# EAGLE board me433-hw6_p2 (EAGLE 9.6.2)
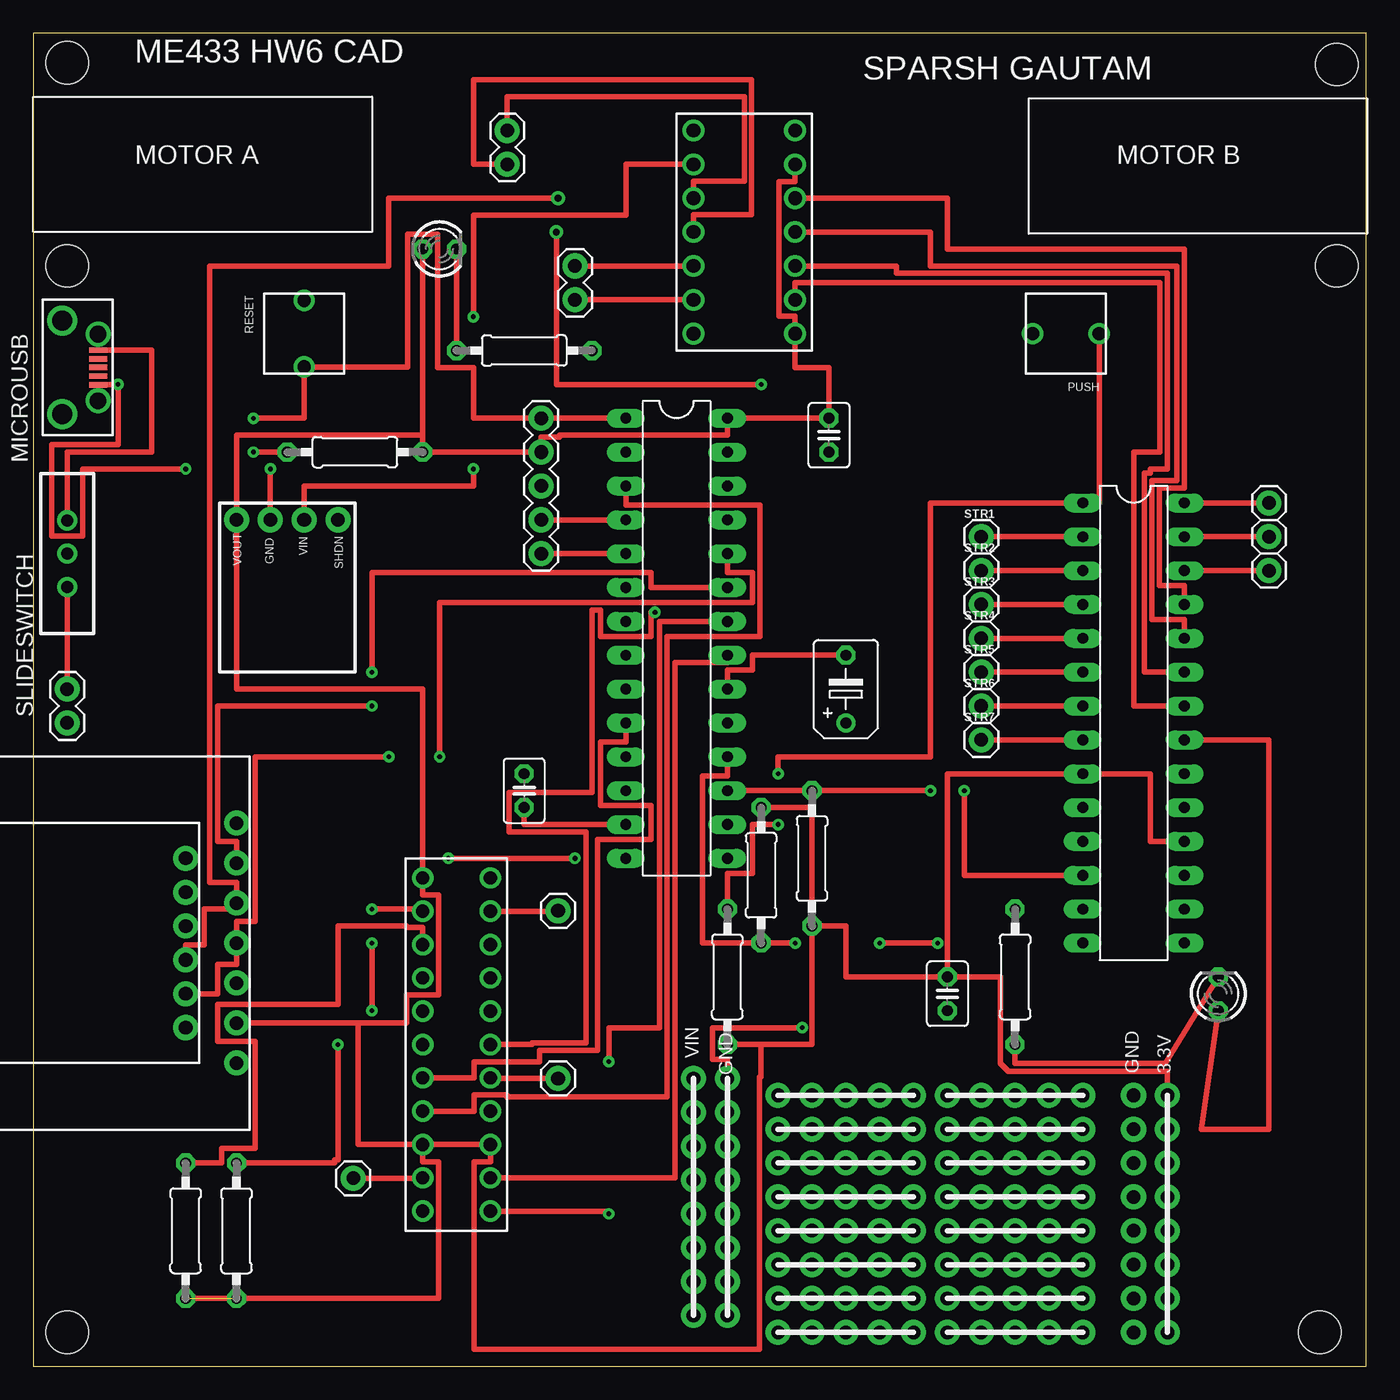
[diagram p0: board, top side]
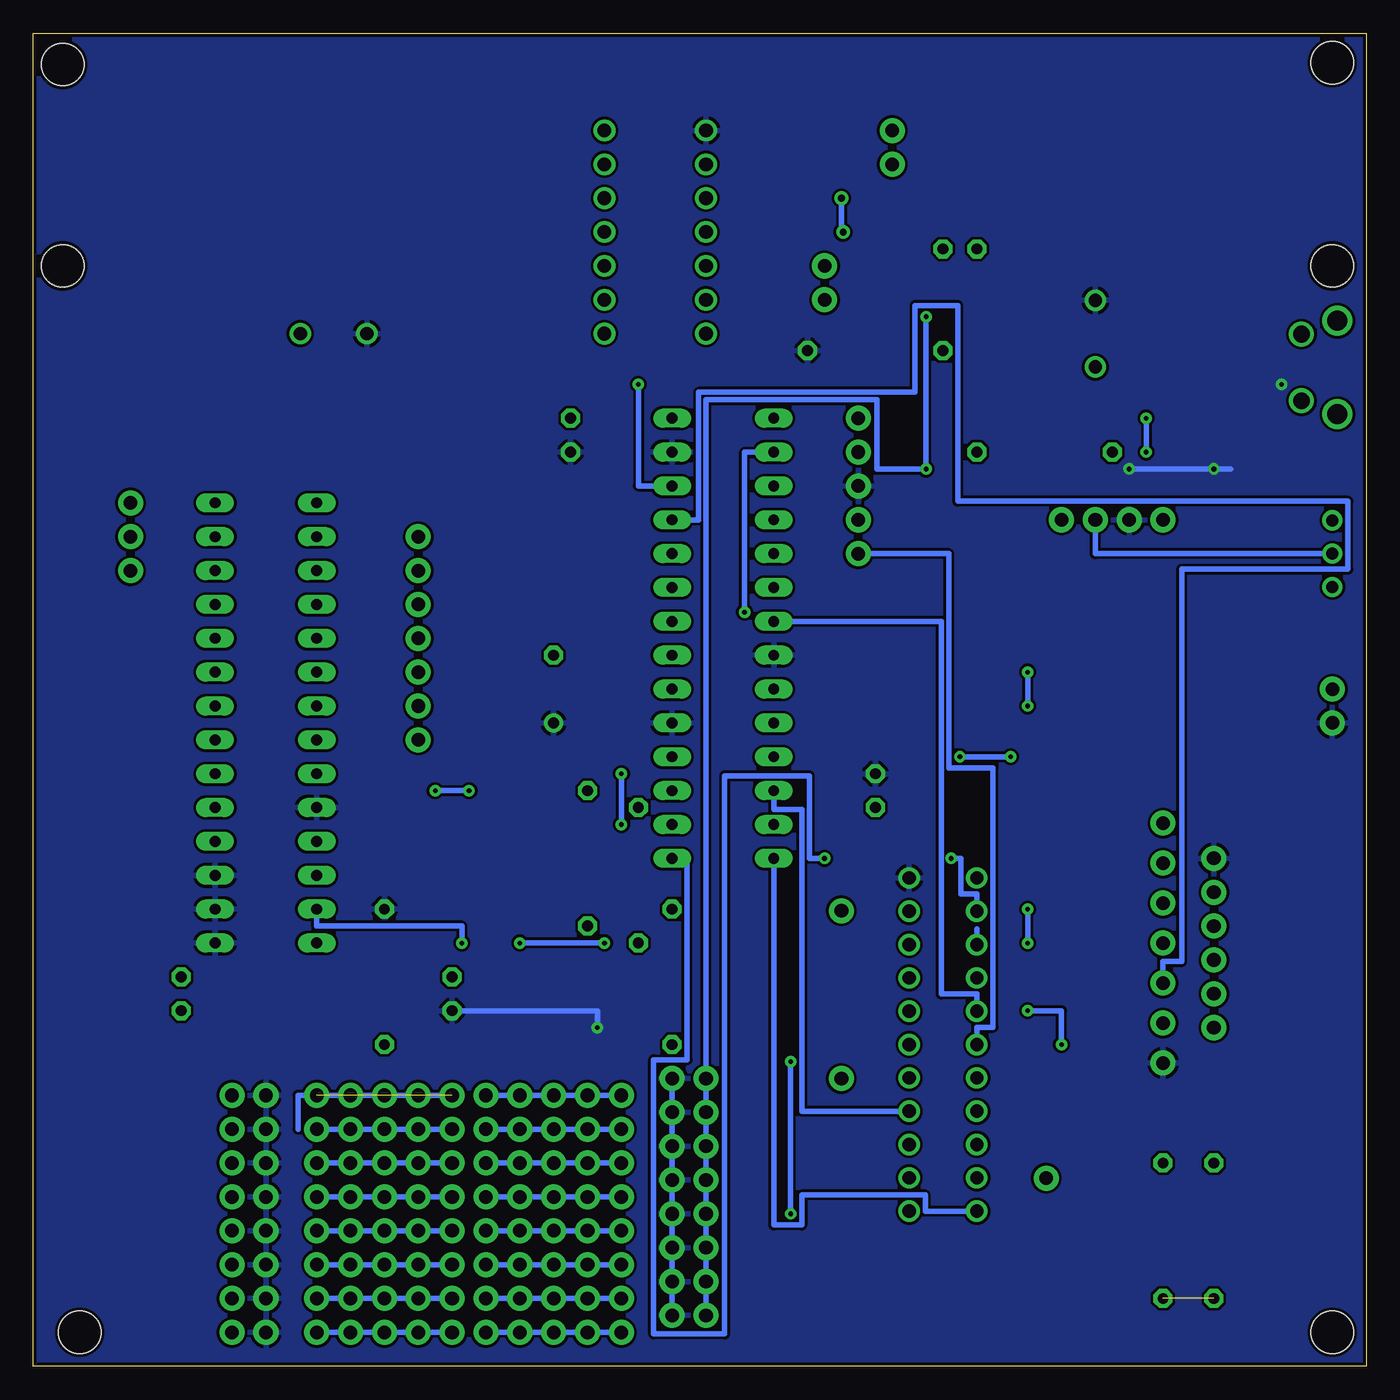
[diagram p1: board, bottom side, seen from below]

Size 100 x 100 mm. Coordinates in mm from the lower left corner, seen from the top.
Outline: 0,0 100,0 100,100 0,100 0,0
Copper layers (1*16): Top 0.035mm / dielectric 1.5mm / Bottom 0.035mm
Design rules "SparkFun": minimum track width 8mil, minimum drill 20mil, track to track 8mil, track to pad 8mil, pad to pad 8mil, via to via 8mil, smd to smd 8mil, copper to edge 10mil, drill to drill 8mil, minimum pad ring 12mil, minimum via ring 10mil, stop-mask expansion 4mil, vias tented up to drill 25mil, thermal gap 10mil
Holes 3.17 mm at 2.54,97.79 2.54,82.55 97.79,82.55 97.79,97.66 2.54,2.54 96.52,2.54

## Footprints (pad centres in the part's own frame; a part is rotated, then mirrored left to right if it is on the bottom)
1X02 = drill 1.016 pad 1.88: 1 0,0; 2 2.54,0
C025-030X050 = drill 0.813 octagon: 1 -1.27,0; 2 1.27,0
B45181B = drill 0.813: + -2.54,0 | drill 0.813 octagon: - 2.54,0
1X01 = drill 1.016 pad 1.88: 1 0,0
1X08 = drill 1.016 pad 1.88: 1 0,0; 2 2.54,0; 3 5.08,0; 4 7.62,0; 5 10.16,0; 6 12.7,0; 7 15.24,0; 8 17.78,0
LED3MM = drill 0.813 octagon: A -1.27,0; K 1.27,0
0207/10 = drill 0.813 octagon: 1 -5.08,0; 2 5.08,0
PUSH = drill 1: P$1 -2.5,0; P$2 2.5,0
DIL28-3 = drill 0.813 long: 1 -16.51,-3.81; 2 -13.97,-3.81; 3 -11.43,-3.81; 4 -8.89,-3.81; 5 -6.35,-3.81; 6 -3.81,-3.81; 7 -1.27,-3.81; 8 1.27,-3.81; 9 3.81,-3.81; 10 6.35,-3.81; 11 8.89,-3.81; 12 11.43,-3.81; 13 13.97,-3.81; 14 16.51,-3.81; 15 16.51,3.81; 16 13.97,3.81; 17 11.43,3.81; 18 8.89,3.81; 19 6.35,3.81; 20 3.81,3.81; 21 1.27,3.81; 22 -1.27,3.81; 23 -3.81,3.81; 24 -6.35,3.81; 25 -8.89,3.81; 26 -11.43,3.81; 27 -13.97,3.81; 28 -16.51,3.81
MICROUSB = smd 0.4 x 1.35: 1.VBUS -1.3,2.7; 2 -0.65,2.7; 3 0,2.7; 4 0.65,2.7; 5.GND 1.3,2.7 | drill 1.25 pad 1.676: P$6 -2.5,2.7; P$7 2.5,2.7 | drill 1.5: P$8 -3.5,0; P$9 3.5,0
SLIDESWITCH = drill 0.9: 1 -2.5,0; 2 0,0; 3 2.5,0
POLULO3V3 = drill 1.016 pad 1.88: 1 0,3.81; 2 0,1.27; 3 0,-1.27; 4 0,-3.81
1X05 = drill 1.016 pad 1.88: 1 0,0; 2 2.54,0; 3 5.08,0; 4 7.62,0; 5 10.16,0
H-BRIDGE = drill 1.02: P$1 -3.81,7.62; P$2 -3.81,5.08; P$3 -3.81,2.54; P$4 -3.81,0; P$5 -3.81,-2.54; P$6 -3.81,-5.08; P$7 -3.81,-7.62; P$8 3.81,-7.62; P$9 3.81,-5.08; P$10 3.81,-2.54; P$11 3.81,0; P$12 3.81,2.54; P$13 3.81,5.08; P$14 3.81,7.62
FRIEND = drill 1.016 pad 1.88: 1 -6.35,0; 2 -3.81,0; 3 -1.27,0; 4 1.27,0; 5 3.81,0; 6 6.35,0
LCD = drill 1.016 pad 1.88: 1 -9,-20.32; 2 -6,-20.32; 3 -3,-20.32; 4 0,-20.32; 5 3,-20.32; 6 6,-20.32; 7 9,-20.32
CAMERA = drill 1: P$1 0,12.5; P$2 0,10; P$3 0,7.5; P$4 0,5; P$5 0,2.5; P$6 0,0; P$7 0,-2.5; P$8 0,-5; P$9 0,-7.5; P$10 0,-10; P$11 0,-12.5; P$12 5.08,-12.5; P$13 5.08,-10; P$14 5.08,-7.5; P$15 5.08,-5; P$16 5.08,-2.5; P$17 5.08,0; P$18 5.08,2.5; P$19 5.08,5; P$20 5.08,7.5; P$21 5.08,10; P$22 5.08,12.5

## Placement (x,y rotation side)
A  [1X02]  40.64,80.01 90 top
B  [1X02]  35.56,90.17 90 top
BAT  [1X02]  2.54,48.26 90 top
C1  0.1uF  [C025-030X050]  59.69,69.85 270 top
C2  10uF  [B45181B]  60.96,50.8 90 top
C3  0.1uF  [C025-030X050]  36.83,43.18 90 top
C4  0.1uF  [C025-030X050]  68.58,27.94 270 top
HREF  [1X01]  39.37,34.16 0 top
J1  [1X08]  55.88,2.54 90 top
J2  [1X08]  58.42,2.54 90 top
J3  [1X08]  60.96,2.54 90 top
J4  [1X08]  63.5,2.54 90 top
J5  [1X08]  66.04,2.54 90 top
J6  [1X08]  68.58,2.54 90 top
J7  [1X08]  71.12,2.54 90 top
J8  [1X08]  73.66,2.54 90 top
J9  [1X08]  76.2,2.54 90 top
J10  [1X08]  78.74,2.54 90 top
J11  [1X08]  49.53,3.81 90 top
J12  [1X08]  52.07,3.81 90 top
J13  [1X08]  85.09,2.54 90 top
J14  [1X08]  82.55,2.54 90 top
LED1  RED  [LED3MM]  30.48,83.82 0 top
LED2  GREEN  [LED3MM]  88.9,27.94 90 top
PWDN  [1X01]  39.37,21.59 0 top
R1  330  [0207/10]  36.83,76.2 180 top
R2  10k  [0207/10]  24.13,68.58 0 top
R3  10k  [0207/10]  58.42,38.1 270 top
R4  10k  [0207/10]  54.61,36.83 90 top
R5  330  [0207/10]  73.66,29.21 270 top
R6  10k  [0207/10]  52.07,29.21 270 top
R7  4.7k  [0207/10]  15.24,10.16 270 top
R8  4.7k  [0207/10]  11.43,10.16 270 top
RESET  PUSH  [PUSH]  20.32,77.47 90 top
STR  [1X01]  24,14.1 0 top
STR1  [1X01]  71.12,62.23 0 top
STR2  [1X01]  71.12,59.69 0 top
STR3  [1X01]  71.12,57.15 0 top
STR4  [1X01]  71.12,54.61 0 top
STR5  [1X01]  71.12,52.07 0 top
STR6  [1X01]  71.12,49.53 0 top
STR7  [1X01]  71.12,46.99 0 top
STR8  [1X01]  92.71,62.23 0 top
STR9  [1X01]  92.71,64.77 0 top
STR10  [1X01]  92.71,59.69 0 top
U$1  PIC32MX170F256B  [DIL28-3]  48.26,54.61 270 top
U$2  MICROUSB  [MICROUSB]  2.16,74.93 270 top
U$3  SLIDESWITCH  [SLIDESWITCH]  2.54,60.96 270 top
U$4  POLOLU3V3  [POLULO3V3]  19.05,63.5 90 top
U$5  SNAP  [1X05]  38.1,71.12 270 top
U$6  H-BRIDGE  [H-BRIDGE]  53.34,85.09 0 top
U$7  FRIEND  [FRIEND]  11.43,31.75 90 top
U$8  LCD  [LCD]  -5.08,31.75 90 top
U$9  IO_EXPANDER  [DIL28-3]  82.55,48.26 270 top
U$10  CAMERA  [CAMERA]  29.21,24.13 0 top
USER  PUSH  [PUSH]  77.47,77.47 0 top

## Library data of the parts
A B BAT HREF LED1 LED2 PWDN RESET STR STR1-STR10 U$1-U$10 USER = hw6_lib
C1-C4 = hw6_lib; SPICEPREFIX: C
J1-J14 = hw6_lib; PROD_ID: CONN-08438
R1-R8 = hw6_lib; SPICEPREFIX: R

## Nets
+3V3: C1.1 C4.1 J13.1 J13.2 J13.3 J13.4 J13.5 J13.6 J13.7 J13.8 LED1.A R2.2 R3.2 R4.2 R6.2 R7.2 R8.2 U$1.28 U$4.1 U$5.2 U$6.P$8 U$6.P$13 U$8.2 U$9.9 U$9.18 U$10.P$1 U$10.P$9 U$10.P$14
+5V: U$2.1.VBUS U$3.1
ADIR: U$6.P$9 U$9.22
APWM: U$6.P$10 U$9.23
B0-PGD-D4: U$1.4 U$5.4
B1-PGC-D5: U$1.5 U$5.5 U$10.P$6
B6: R7.1 U$1.15 U$10.P$2
B7: R8.1 U$10.P$3
B8: R3.1 U$1.17 U$9.12
B9: R4.1 U$1.18 U$9.13
B12: U$1.23 U$8.6
B13: U$1.24 U$7.2 U$8.4
B14: U$1.25 U$8.3
B15: U$1.26 U$7.3 U$8.5
BDIR: U$6.P$11 U$9.24
BPWM: U$6.P$12 U$9.25
D0: U$1.2 U$10.P$17
D1: U$1.3 U$10.P$8
D2: U$10.P$18
D3: U$1.10 U$10.P$7
D6: U$10.P$20
D7: U$1.7 U$10.P$5
GND: BAT.1 C1.2 C2.+ C3.2 C4.2 J12.1 J12.2 J12.3 J12.4 J12.5 J12.6 J12.7 J12.8 J14.1 J14.2 J14.3 J14.4 J14.5 J14.6 J14.7 J14.8 R1.1 R5.1 RESET.P$2 U$1.8 U$1.19 U$1.27 U$2.5.GND U$4.2 U$5.3 U$6.P$1 U$7.6 U$8.1 U$9.10 U$9.15 U$9.16 U$9.17 U$10.P$22 USER.P$1
MCLR: R2.1 RESET.P$1 U$1.1 U$5.1
N$2: LED1.K R1.2
N$3: C2.- U$1.20
N$4: C3.1 U$1.13
N$5: LED2.A U$9.21
N$6: R6.1 U$9.1 USER.P$2
N$7: LED2.K R5.2
N$8: U$6.P$14
N$9: B.2 U$6.P$3
N$10: B.1 U$6.P$4
N$11: A.2 U$6.P$5
N$12: A.1 U$6.P$6
N$13: STR.1 U$10.P$10
N$14: PWDN.1 U$10.P$16
N$15: HREF.1 U$10.P$21
N$16: STR8.1 U$9.27
N$17: STR9.1 U$9.28
N$18: STR10.1 U$9.26
N$19: STR1.1 U$9.2
N$20: STR2.1 U$9.3
N$21: STR3.1 U$9.4
N$22: STR4.1 U$9.5
N$23: STR5.1 U$9.6
N$24: STR6.1 U$9.7
N$25: STR7.1 U$9.8
N$26: J1.8 J2.8 J3.8 J4.8 J5.8
N$27: J1.7 J2.7 J3.7 J4.7 J5.7
N$28: J1.6 J2.6 J3.6 J4.6 J5.6
N$29: J1.5 J2.5 J3.5 J4.5 J5.5
N$30: J1.4 J2.4 J3.4 J4.4 J5.4
N$31: J1.3 J2.3 J3.3 J4.3 J5.3
N$32: J1.2 J2.2 J3.2 J4.2 J5.2
N$33: J1.1 J2.1 J3.1 J4.1 J5.1
N$34: J6.8 J7.8 J8.8 J9.8 J10.8
N$35: J6.7 J7.7 J8.7 J9.7 J10.7
N$36: J6.6 J7.6 J8.6 J9.6 J10.6
N$37: J6.5 J7.5 J8.5 J9.5 J10.5
N$38: J6.4 J7.4 J8.4 J9.4 J10.4
N$39: J6.3 J7.3 J8.3 J9.3 J10.3
N$40: J6.2 J7.2 J8.2 J9.2 J10.2
N$41: J6.1 J7.1 J8.1 J9.1 J10.1
RCK: U$1.12 U$10.P$15
RRST: U$1.21 U$10.P$13
V+: BAT.2 U$3.3
VIN: J11.1 J11.2 J11.3 J11.4 J11.5 J11.6 J11.7 J11.8 U$3.2 U$4.3 U$6.P$2
VSY: U$10.P$4
WR: U$1.14 U$10.P$11
WRST: U$1.22 U$10.P$12

## Tracks (layer width: path | path; a pad name or v marks a point on that pad's centre or on a via)
+3V3  (1 unrouted)
  Top 0.406: R2.2 29.21,69.85 15.24,69.85 U$4.1 15.24,50.8 29.21,50.8 U$10.P$1 29.21,35.34 30.42,35.34 30.42,27.84 28,27.84 28,25.75 U$8.2 24.38,25.75 24.38,16.63 U$10.P$9 | R2.2 LED1.A | R2.2 U$5.2 38.1,69.72 39.5,69.72 39.5,69.85 52.07,69.85 U$1.28 C1.1 59.69,74.93 57.15,74.93 U$6.P$8 57.15,78.79 55.93,78.79 55.93,88.85 57.15,88.85 U$6.P$13 | U$10.P$9 U$10.P$14 34.29,15.34 33.08,15.34 33.08,1.27 54.48,1.27 54.48,21.72 54.61,21.72 54.61,24.13 | C4.1 68.58,44.45 U$9.9 83.82,44.45 83.82,39.37 U$9.18 | U$10.P$9 29.21,15.34 30.42,15.34 30.42,5.08 R8.2 | R3.2 58.42,24.13 54.61,24.13 | R3.2 60.96,33.02 60.96,29.21 C4.1 | R4.2 58.42,41.91 R3.2 | C4.1 72.54,29.21 72.54,22.71 73.14,22.11 85.09,22.11 J13.8 J13.7 J13.6 J13.5 J13.4 J13.3 J13.2 J13.1 | R6.2 54.61,24.13
+5V
  Top 0.406: U$2.1.VBUS 8.89,76.23 8.89,76.2 8.89,68.58 2.54,68.58 U$3.1
ADIR
  Top 0.406: U$9.22 82.55,49.53 82.55,68.58 84.53,68.58 84.53,81.28 57.15,81.28 U$6.P$9
APWM
  Top 0.406: U$9.23 83.36,52.07 83.36,67 83.82,67 83.82,67.31 85.09,67.31 85.09,81.99 64.77,81.99 64.77,82.55 U$6.P$10
B0-PGD-D4
  Top 0.406: U$1.4 U$5.4
B1-PGC-D5
  Top 0.406: U$1.5 U$5.5
  Bottom 0.406: U$10.P$6 29.21,25.42 28,25.42 28,44.88 31.32,44.88 31.32,60.96 U$5.5
B6  (via drill 0.35)
  Top 0.406: v22.86,24.13 22.86,15.49 22.61,15.49 22.61,15.24 R7.1 | v25.4,26.67 v25.4,31.75 | v25.4,34.29 29.21,34.29 U$10.P$2 | v31.14,38.1 v40.64,38.1
  Bottom 0.406: v22.86,24.13 22.86,26.67 v25.4,26.67 | v25.4,31.75 v25.4,34.29 | U$10.P$2 29.21,35.42 30.42,35.42 30.42,38.1 v31.14,38.1 31.32,38.1 | v40.64,38.1 41.79,38.1 41.79,44.3 48.13,44.3 48.13,2.41 53.47,2.41 53.47,22.99 50.95,22.99 50.95,38.1 U$1.15
B7
  Top 0.406: R8.1 14.12,15.24 14.12,16.36 16.64,16.36 16.64,24.35 13.84,24.35 13.84,27.15 22.86,27.15 22.86,33.02 28,33.02 28,32.92 29.21,32.92 U$10.P$3
  Bottom 0.406: U$10.P$3 29.21,32.82
B8  (via drill 0.35)
  Top 0.406: U$1.17 R3.1 v67.31,43.18 | U$9.12 69.85,36.83 v69.85,43.18
  Bottom 0.406: v69.85,43.18 v67.31,43.18
B9  (via drill 0.35)
  Top 0.406: v57.15,31.75 R4.1 50.19,31.75 50.19,44.3 52.07,44.3 U$1.18 | v63.5,31.75 v67.85,31.75 68.02,31.75
  Bottom 0.406: v57.15,31.75 v63.5,31.75 | v67.85,31.75 67.85,33.02 78.74,33.02 U$9.13
  other vias: 78.74,34.29
B12  (via drill 0.35)
  Top 0.406: U$8.6 15.24,39.35 13.84,39.35 13.84,49.53 v25.4,49.53 | U$1.23 46.33,58.42 46.33,59.54 25.4,59.54 v25.4,52.07
  Bottom 0.406: v25.4,49.53 v25.4,52.07
B13  (via drill 0.35)
  Top 0.406: U$7.2 13.84,27.94 13.84,30.15 15.24,30.15 U$8.4 15.24,33.35 16.64,33.35 16.64,45.72 v26.67,45.72 | v30.48,45.72 30.48,57.3 53.95,57.3 53.95,59.54 52.07,59.54 U$1.24
  Bottom 0.406: v26.67,45.72 v30.48,45.72
B14
  Bottom 0.406: U$8.3 15.24,30.35 13.84,30.35 13.84,59.8 1.38,59.8 1.38,64.9 30.63,64.9 30.63,79.58 33.85,79.58 33.85,73.08 50.09,73.08 50.09,63.5 U$1.25
B15  (via drill 0.35, 0.51)
  Top 0.406: U$7.3 11.43,31.62 12.83,31.62 12.83,34.29 15.24,34.29 U$8.5 15.24,36.3 13.23,36.3 13.23,82.55 26.67,82.55 26.67,87.63 v39.37,87.63 | 39.24,85.14 v39.24,85.09 39.24,73.66 v54.61,73.66
  Bottom 0.406: v54.61,73.66 54.61,66.04 U$1.26 | v39.37,87.63 39.37,85.09 v39.24,85.09
BDIR
  Top 0.406: U$9.24 86.36,56.03 83.92,56.03 83.92,66.45 85.8,66.45 85.8,82.55 67.31,82.55 67.31,85.09 U$6.P$11
BPWM
  Top 0.406: U$9.25 86.36,58.57 84.48,58.57 84.48,65.89 86.36,65.89 86.36,83.82 68.58,83.82 68.58,87.63 U$6.P$12
D0  (via drill 0.35)
  Top 0.406: U$10.P$17 37.41,24.13 37.41,24.25 41.48,24.25 41.48,40.08 35.71,40.08 35.71,43.03 41.91,43.03 41.91,56.74 42.57,56.74 42.57,54.76 46.33,54.76 46.33,56.57 v46.64,56.57
  Bottom 0.406: v46.64,56.57 46.64,68.58 U$1.2
D1
  Top 0.406: U$10.P$8 33.08,19.13 33.08,20.34 35.5,20.34 35.5,20.19 47.55,20.19 47.55,54.76 54.51,54.76 54.51,64.62 44.45,64.62 U$1.3
D3
  Top 0.406: U$10.P$7 33.08,21.63 33.08,22.84 37.97,22.84 37.97,23.7 42.34,23.7 42.34,39.52 46.33,39.52 46.33,42.06 42.57,42.06 42.57,46.84 44.45,46.84 U$1.10
D7
  Bottom 0.406: U$10.P$5 29.21,27.92 31.87,27.92 31.87,55.88 U$1.7
GND  (via drill 0.35)
  Top 0.406: U$2.5.GND 6.35,73.63 v6.35,73.66 6.35,69.14 1.38,69.14 1.38,62.3 3.7,62.3 3.7,67.31 v11.43,67.31 | J12.8 52.07,23.01 50.95,23.01 50.95,25.4 v57.69,25.4 57.86,25.4 | U$4.2 v17.78,67.31
  Bottom 0.406: v57.69,25.4 57.69,26.67 C4.2 | 10.16,67.31 v11.43,67.31 v17.78,67.31 | J12.8 J12.7 J12.6 J12.5 J12.4 J12.3 J12.2 J12.1
  pour Bottom: 0,0 100.33,0 100.33,99.06 100.33,100.33 0,100.33
  pour Bottom: 0,0 100.33,0 100.33,100.33 0,100.33
  pour Bottom: 0,0 100.33,0 100.33,100.33 0,100.33
  pour Bottom: 0,0 100.33,0 100.33,100.33 0,100.33
MCLR  (via drill 0.35)
  Top 0.406: U$1.1 U$5.1 33.02,71.12 33.02,74.93 30.33,74.93 30.33,84.94 28.09,84.94 28.09,74.97 RESET.P$1 20.32,71.12 v16.51,71.12 | v16.51,68.58 R2.1
  Bottom 0.406: v16.51,71.12 v16.51,68.58
N$2
  Top 0.406: R1.2 LED1.K
N$3
  Top 0.406: U$1.20 52.07,52.22 53.95,52.22 53.95,53.34 C2.-
N$4
  Top 0.406: U$1.13 36.83,40.64 C3.1
N$5
  Top 0.406: LED2.A 87.63,17.78 92.71,17.78 92.71,46.99 U$9.21
N$6  (via drill 0.35)
  Top 0.406: USER.P$2 79.97,64.77 U$9.1 67.31,64.77 67.31,45.72 55.88,45.72 v55.88,44.45 | R6.1 52.07,36.98 53.95,36.98 53.95,40.64 v55.88,40.64
  Bottom 0.406: v55.88,40.64 v55.88,44.45
N$7
  Top 0.406: LED2.K 84.94,22.71 73.66,22.71 R5.2
N$9
  Top 0.406: U$6.P$3 49.53,88.9 53.34,88.9 53.34,95.25 35.56,95.25 B.2
N$10
  Top 0.406: U$6.P$4 49.53,86.41 53.9,86.41 53.9,96.52 33.02,96.52 33.02,90.17 B.1
N$11
  Top 0.406: U$6.P$5 A.2
N$12
  Top 0.406: U$6.P$6 A.1
N$13
  Top 0.406: U$10.P$10 29.21,14.1 STR.1
N$14
  Top 0.406: U$10.P$16 34.29,21.59 PWDN.1
N$15
  Top 0.406: U$10.P$21 39.37,34.13 HREF.1
N$16
  Top 0.406: U$9.27 STR8.1
N$17
  Top 0.406: U$9.28 STR9.1
N$18
  Top 0.406: U$9.26 STR10.1
N$19
  Top 0.406: U$9.2 STR1.1
N$20
  Top 0.406: U$9.3 STR2.1
N$21
  Top 0.406: U$9.4 STR3.1
N$22
  Top 0.406: U$9.5 STR4.1
N$23
  Top 0.406: U$9.6 STR5.1
N$24
  Top 0.406: U$9.7 STR6.1
N$25
  Top 0.406: U$9.8 STR7.1
N$26
  Bottom 0.406: J1.8 J2.8 J3.8 J4.8 J5.8
N$27
  Bottom 0.406: J1.7 J2.7 J3.7 J4.7 J5.7
N$28
  Bottom 0.406: J1.6 J2.6 J3.6 J4.6 J5.6
N$29
  Bottom 0.406: J1.5 J2.5 J3.5 J4.5 J5.5
N$30
  Bottom 0.406: J1.4 J2.4 J3.4 J4.4 J5.4
N$31
  Bottom 0.406: J1.3 J2.3 J3.3 J4.3 J5.3
N$32
  Bottom 0.406: J1.2 J2.2 J3.2 J4.2 J5.2
N$33
  Bottom 0.406: J1.1 J2.1 J3.1 J4.1 J5.1
N$34  (4 unrouted)
  Bottom 0.406: J6.8 80.14,20.32 80.14,17.78
N$35
  Bottom 0.406: J6.7 J7.7 J8.7 J9.7 J10.7
N$36
  Bottom 0.406: J6.6 J7.6 J8.6 J9.6 J10.6
N$37
  Bottom 0.406: J6.5 J7.5 J8.5 J9.5 J10.5
N$38
  Bottom 0.406: J6.4 J7.4 J8.4 J9.4 J10.4
N$39
  Bottom 0.406: J6.3 J7.3 J8.3 J9.3 J10.3
N$40
  Bottom 0.406: J6.2 J7.2 J8.2 J9.2 J10.2
N$41
  Bottom 0.406: J6.1 J7.1 J8.1 J9.1 J10.1
RCK
  Bottom 0.406: U$1.12 44.45,41.76 42.34,41.76 42.34,19.13 U$10.P$15
RRST
  Top 0.406: U$10.P$13 48.13,14.13 48.13,52.78 52.07,52.78 U$1.21
V+
  Top 0.406: BAT.2 U$3.3
VIN  (via drill 0.35)
  Top 0.406: U$4.3 20.32,66.04 33.02,66.04 v33.02,67.31 | v33.02,78.74 33.02,86.36 44.45,86.36 44.45,90.17 U$6.P$2
  Bottom 0.406: v33.02,78.74 v33.02,67.31 36.7,67.31 36.7,72.52 49.53,72.52 J11.8 J11.7 J11.6 J11.5 J11.4 J11.3 J11.2 J11.1 | U$3.2 20.32,60.96 U$4.3
WR
  Bottom 0.406: U$10.P$11 33.08,11.63 33.08,12.84 42.34,12.84 42.34,10.6 44.45,10.6 U$1.14
WRST  (via drill 0.35)
  Top 0.406: U$10.P$12 43.18,11.63 v43.18,11.43 | v43.18,22.86 43.18,25.4 46.99,25.4 46.99,55.88 U$1.22
  Bottom 0.406: v43.18,11.43 v43.18,22.86

## Text on the board
tPlace: ME433 HW6 CAD | SPARSH GAUTAM | MOTOR A | MOTOR B | VIN | GND | GND | 3.3V